# Altium PCB MEMs_Breakout_Board.PcbDoc
Units mm, origin at the board's own origin, x right, y up, seen from the top; angles counter-clockwise.
Board outline 17.1 x 15.98 mm, 2 copper layers (Top Layer, Bottom Layer); 5 components, 5 nets, 17 pads, 0 vias.
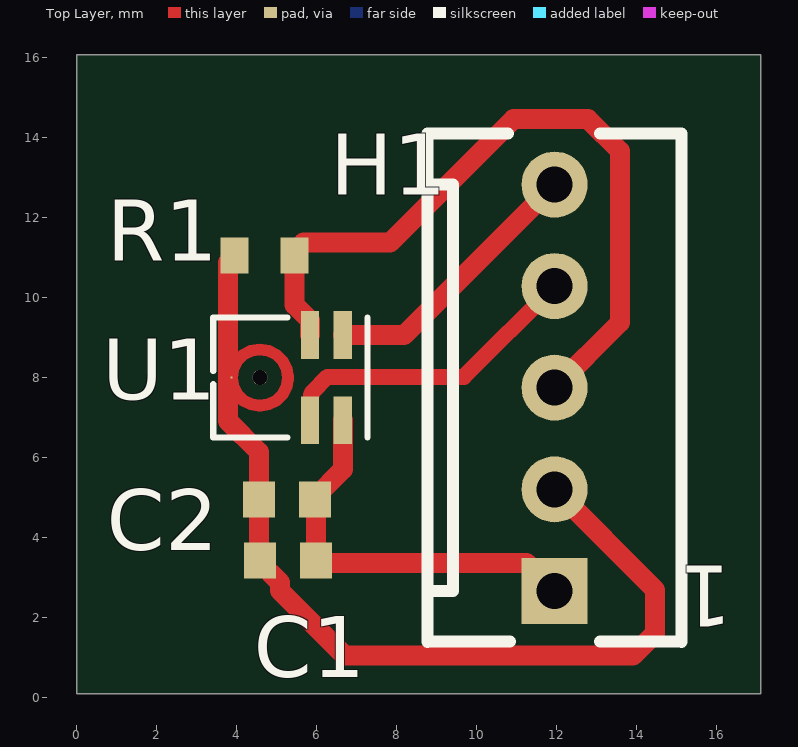
[diagram p0: Top Layer view]
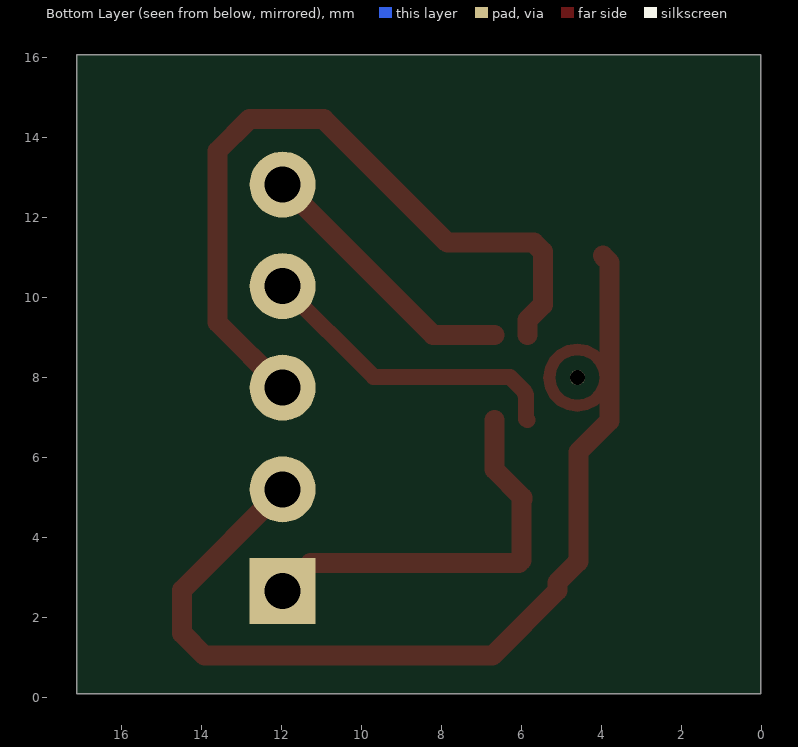
[diagram p1: Bottom Layer view, seen from below]

## Layer stack, top to bottom
Top Solder: solder mask 0.0102, Solder Resist, Dk 3.5
Top Layer: signal copper 0.0356
Dielectric 1: dielectric 0.32, FR-4, Dk 4.8
Bottom Layer: signal copper 0.0356
Bottom Solder: solder mask 0.0102, Solder Resist, Dk 3.5

## Board outline
0.012,0.095 0.012,16.075 17.117,16.075 17.117,0.095
cut-out: 25.654,0.127

## Design rules (kind name [scope] priority, off if disabled: settings)
Clearance [All] p1: gap=0.254 ignorepadtopadclearanceinfootprint=FALSE except(0: Arc-Hole Track-Hole SMDPad-Hole THPad-Hole Via-Hole Fill-Hole Poly-Hole Region-Hole Text-Hole)
PolygonConnect [All] p1: connectstyle=Relief reliefconductorwidth=0.254 reliefentries=4 polygonreliefangle="90 Angle" airgapwidth=0.254
RoutingVias [All] p1: holewidth=0.711 width=1.27 viastyle="Through Hole" minholewidth=0.711 minwidth=1.27 maxholewidth=0.711 maxwidth=1.27
SolderMaskExpansion [All] p1: expansion=0.102
Width [All] p1: maxlimit=1 minlimit=0.4 preferedwidth=0.5
30 further rules are at their usual default settings.

## Components (designator, comment, footprint, x,y, rotation, side; value= is the part's Value field where it differs from the comment)
C1 "10uF" CAPC1608L 5.297,3.429 r0 top
C2 "100nF" CAPC1608L 5.272,4.953 r0 top
H1 "5 Pin Molex KK Hdr" MOLEX_KK_5_HDR 11.963,2.667 r90 top
R1 "10K" RESC1608L 4.712,11.049 r0 top
U1 "SPH0644LM4H-1" SPH0644LM4H-1_KNO 5.359,8.001 r0 top

## Footprints (in the part's own frame and the unit in brackets; to place one, negate y for a bottom-side part, rotate by r counter-clockwise, add the part's x,y. Pads: shape width x height; smd on the part's side, far side on the other; paste and mask are expansions set on the pad)
CAPC1608L [mm] "Chip Capacitor, Body 1.6x0.8mm, IPC High Density"
  rect 0.8x0.9 smd: 1(-0.7,0) 2(0.7,0)
  body extent -0.87,-0.48 0.87,0.48, height 0.85
MOLEX_KK_5_HDR [mil] "MOLEX_KK_5_HDR"
  rect 65x65 hole 35.43: 1(0,0)
  round 65 hole 35.43: 2(100,0) 3(200,0) 4(300,0) 5(400,0)
  silkscreen extent -50,-125 450,125, body extent -44,-118 444,118, height 630
RESC1608L [mm] "Chip Resistor, Body 1.6x0.8mm, IPC High Density"
  rect 0.7x0.9 smd: 1(-0.75,0) 2(0.75,0)
  body extent -0.85,-0.48 0.85,0.48, height 0.9
SPH0644LM4H-1_KNO [mil]
  rect 18x47 smd paste+0 mask+0: 1(51.6,41.97) 2(19.24,41.97) 4(19.24,-41.97) 5(51.6,-41.97)
  rect 2x2 smd: 3(-57.81,0)
  round 15 hole 15 unplated: 6(-30.06,0)
  Top Layer region: 3.32,-2.92 -8.14,-1.92 -8.06,0 -9.13,6.8 -12.26,12.93 -17.12,17.8 -23.26,20.92 -30.06,22 -36.85,20.92 -42.99,17.8 -47.85,12.93 -50.98,6.8 -52.06,0 -51.97,-1.92 -63.43,-2.92 -63.56,0 -61.92,10.35 -57.16,19.69 -49.75,27.1 -40.41,31.86 -30.06,33.5 -19.7,31.86 -10.36,27.1 -2.95,19.69 1.81,10.35 3.44,0
  Top Layer region: 3.32,2.92 -8.14,1.92 -8.06,0 -9.13,-6.8 -12.26,-12.93 -17.12,-17.8 -23.26,-20.92 -30.06,-22 -36.85,-20.92 -42.99,-17.8 -47.85,-12.93 -50.98,-6.8 -52.06,0 -51.97,1.92 -63.43,2.92 -63.56,0 -61.92,-10.35 -57.16,-19.69 -49.75,-27.1 -40.41,-31.86 -30.06,-33.5 -19.7,-31.86 -10.36,-27.1 -2.95,-19.69 1.81,-10.35 3.44,0
  silkscreen extent -76,-59 76,59, body extent 0,0 10,10, height 10

## Part data
C1: library part CC_10uF_0603, "CAP CER 10UF X5R +-20% 6V3 0603", Voltage - Rated=6.3V, Storage Location="PCB Assembly WS", Supplier="ECE Dept"
C2: library part CC_100nF_0603, "CAP CER 100nF X7R +-10% 50V 0603", Code_IPC="1608 [0603]", PackageReference=0603, Storage Location="PCB Assembly WS", Supplier="ECE Dept"
H1: library part JA_MOLEX_KK_5POS, "CONN HEADER 5POS 2.54mm VERT_Thru Hole", Manufacturer=Molex, Manufacturer PN=22-23-2051, Supplier Part Number 1=9731679, Storage Location="ECE Dept Store", Supplier="ECE Dept", Supplier 1=Farnell
R1: library part RS_10K, "RES 10.0K OHM 1/10W 5% 0603 SMD", Storage Location="PCB Assembly WS", Supplier="ECE Dept"
U1: "No Description Available", Built_By=EMA_Cory, Copyright="Copyright (C) 2018 Accelerated Designs. All rights reserved", Manufacturer_Part_Number=SPH0644LM4H-1, RefDes=RefDes, SourceLibrary=Knowles_2019-12-03, Type=DEV, Vendor=Knowles

## Nets (pads, with @x,y where several pads share a name; then routed paths per layer and width w, separated by ;. In a path a pad name is that pad's centre, name@x,y a point inside that pad or via, vN(x,y) a via of type N, cw(c..) or ccw(c..) an arc to the next point about the centre after c; other vN are vias at no path point)
CLK: H1.4 U1.4 | length 7.9
  Top Layer w0.4: U1.4 5.877,6.964 5.877,7.567 5.901,7.592 5.901,7.633 6.284,8.016 9.693,8.016 H1.4
DATA: H1.5 U1.1 | length 6.9
  Top Layer w0.5: U1.1 8.203,9.067 H1.5
GND: C1.1 C2.1 H1.2 R1.1 U1.3 | length 23.9
  Top Layer w0.5: R1.1 3.794,10.881 3.794,6.92 4.572,6.142 C2.1 C1.1@4.572,3.404 ; C1.1 4.597,3.379 5.093,2.883 5.093,2.675 6.72,1.048 13.921,1.048 14.478,1.605 14.478,2.692 H1.2
SELECT: H1.3 R1.2 U1.2 | length 18.7
  Top Layer w0.5: U1.2 5.848,9.435 5.462,9.821 R1.2 5.462,11.149 5.685,11.372 7.848,11.372 10.935,14.459 12.8,14.459 13.596,13.662 13.596,9.38 H1.3
VDD: C1.2 C2.2 H1.1 U1.5 | length 10.1
  Top Layer w0.5: U1.5 6.67,5.701 5.972,5.003 C2.2 5.997,4.928 C1.2 6.061,3.365 11.265,3.365 H1.1
pads on no net: U1.6

## Silkscreen, mask and mechanical layers (free items; w line width, h text height)
Board Outline:
  the board outline again, w0.254

## Text inside footprints (layer, text, board x,y; h text height)
H1: Top Overlay "1" at 16.408,3.302 h1.52 r180